# Altium PCB P-MT3620EXMSTLP-2-0.PcbDoc (part 1 of 3)
Units mm, origin at the board's own origin, x right, y up, seen from the top; angles counter-clockwise.
Board outline 50.01 x 80.01 mm, 4 copper layers (Top Layer, Mid-Layer 1, Mid-Layer 2, Bottom Layer), stack 1.536 mm thick; 94 components, 87 nets, 380 pads, 193 vias.
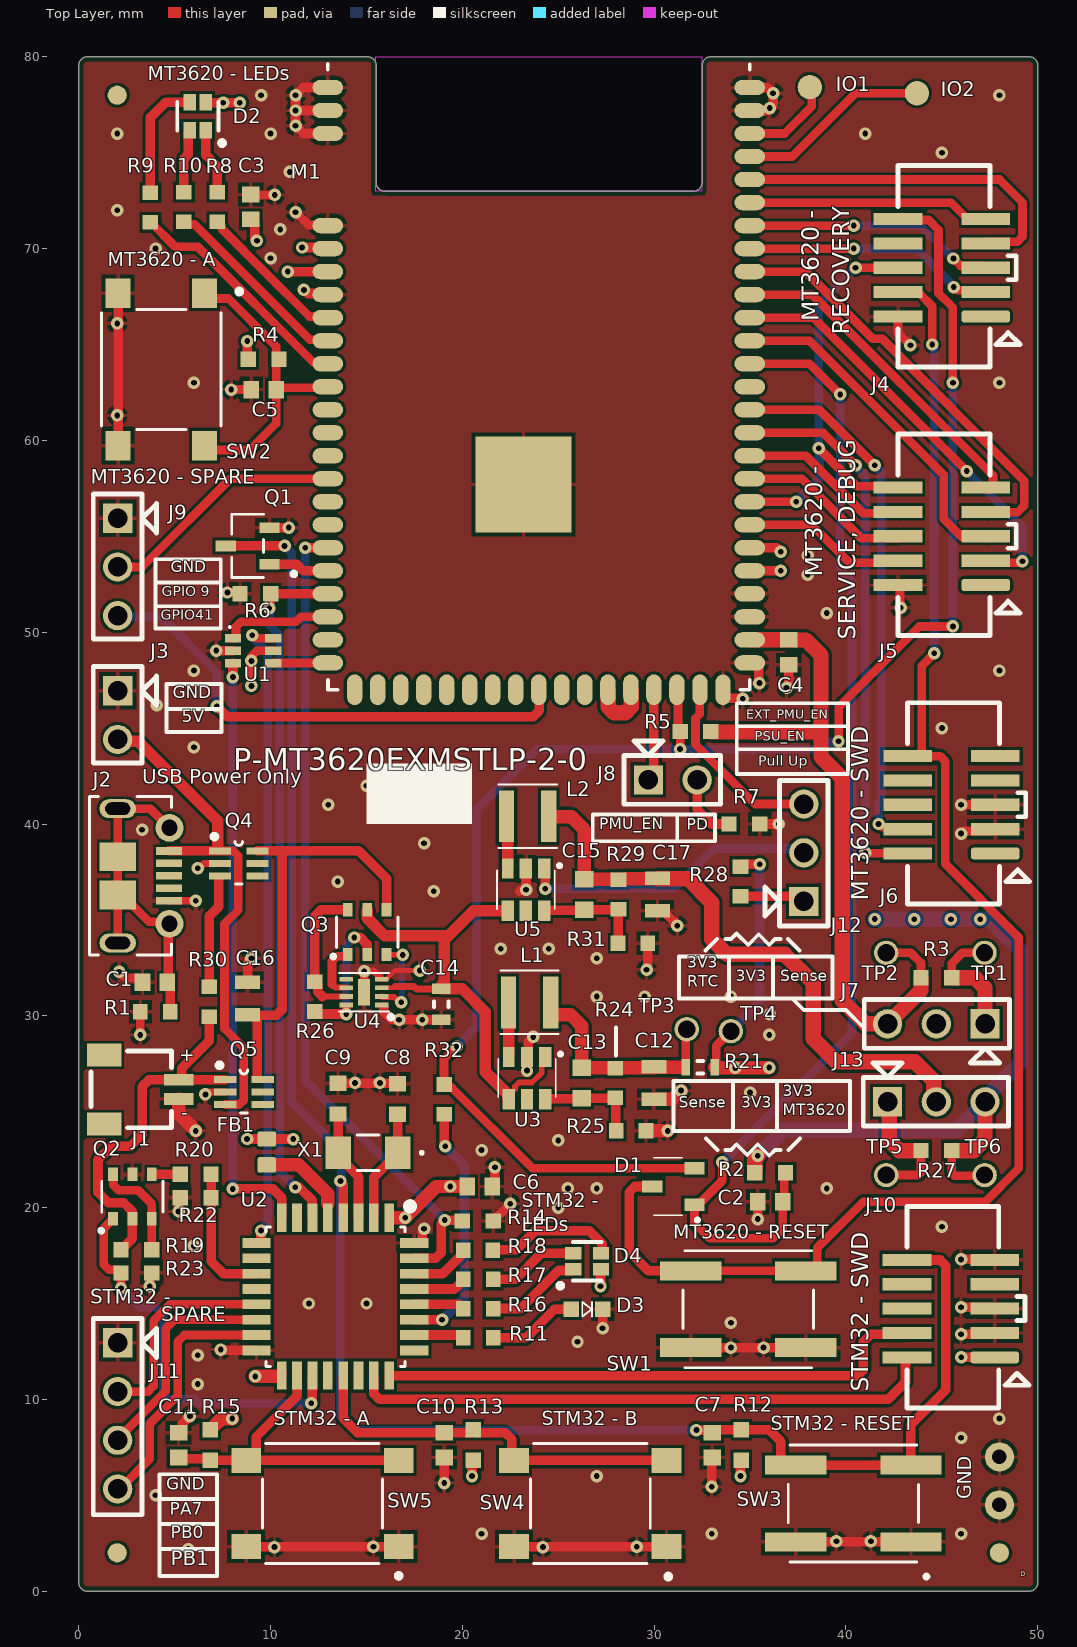
[diagram p0: Top Layer view]
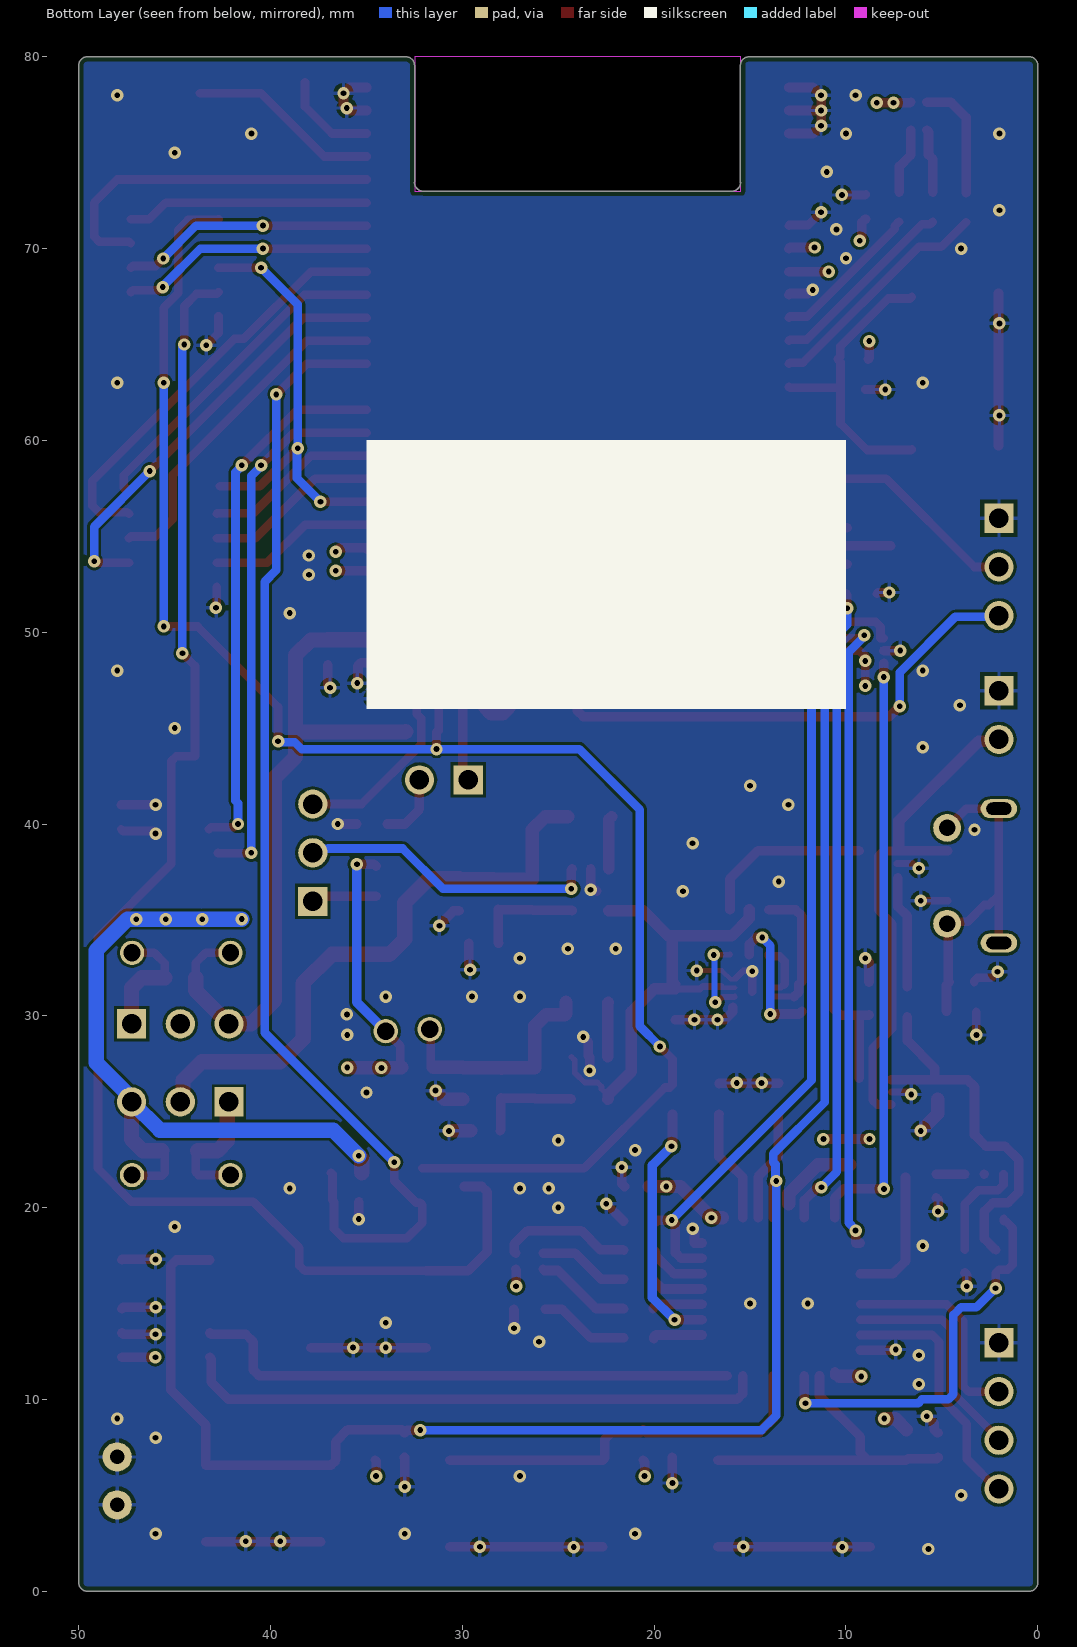
[diagram p1: Bottom Layer view, seen from below]
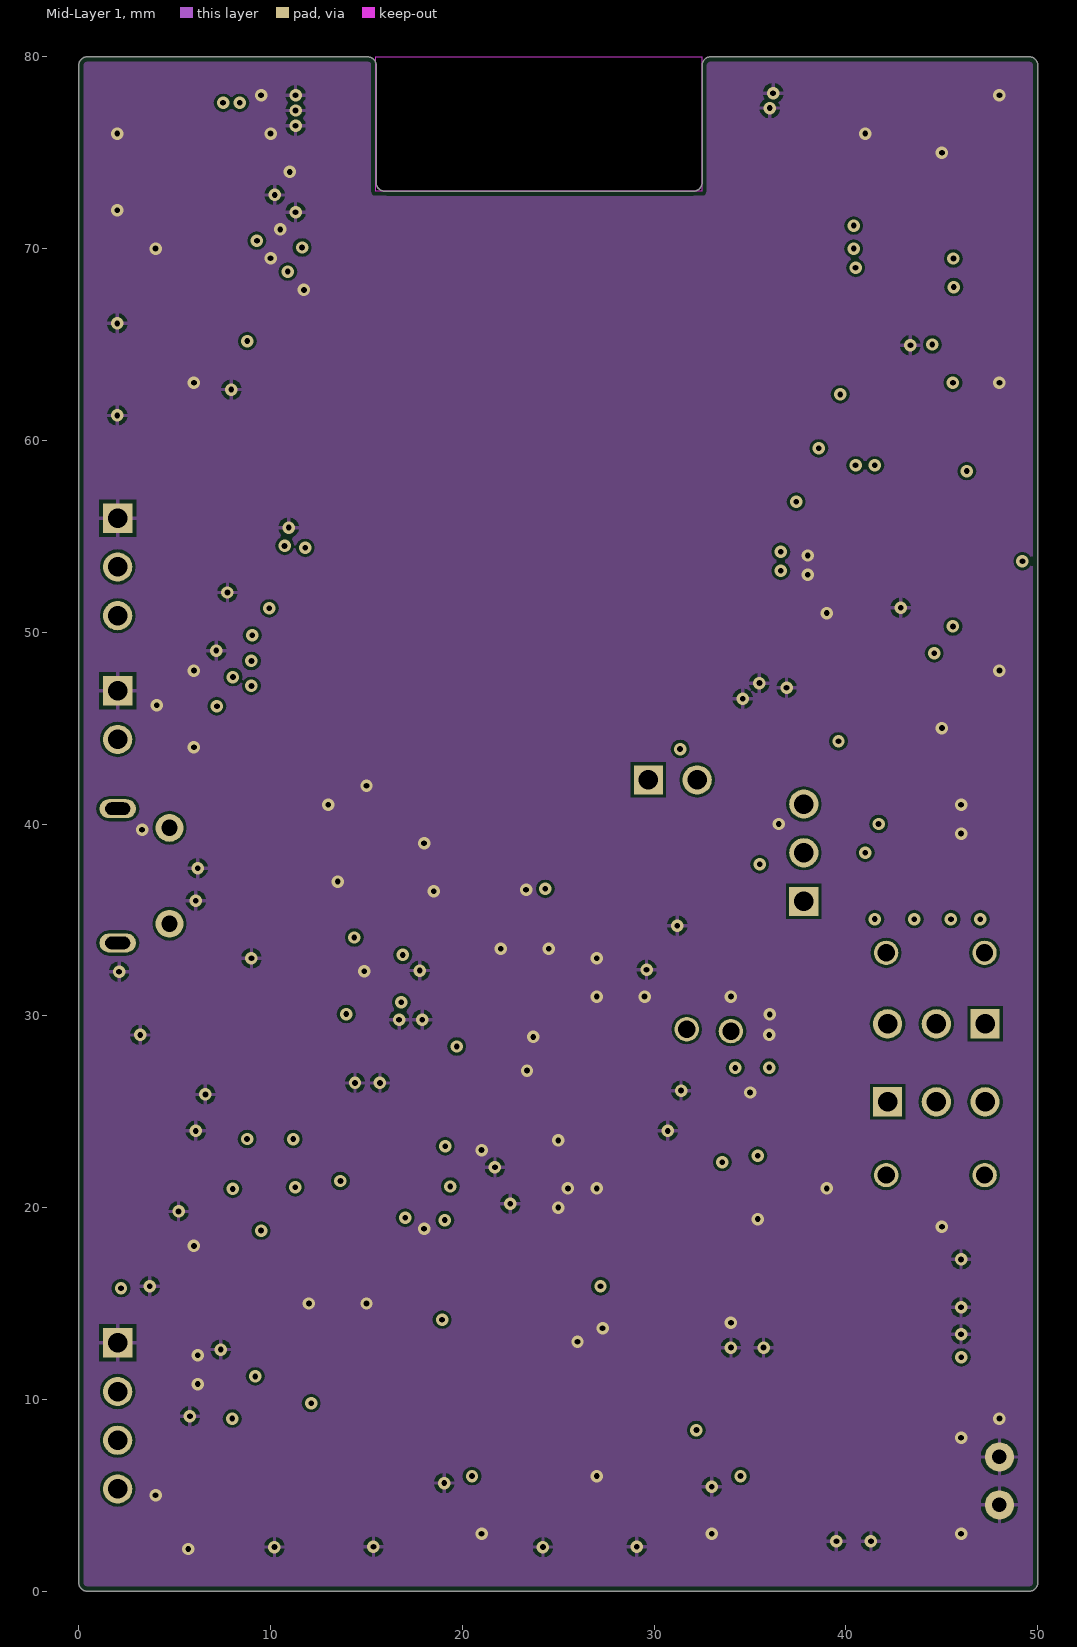
[diagram p2: Mid-Layer 1]
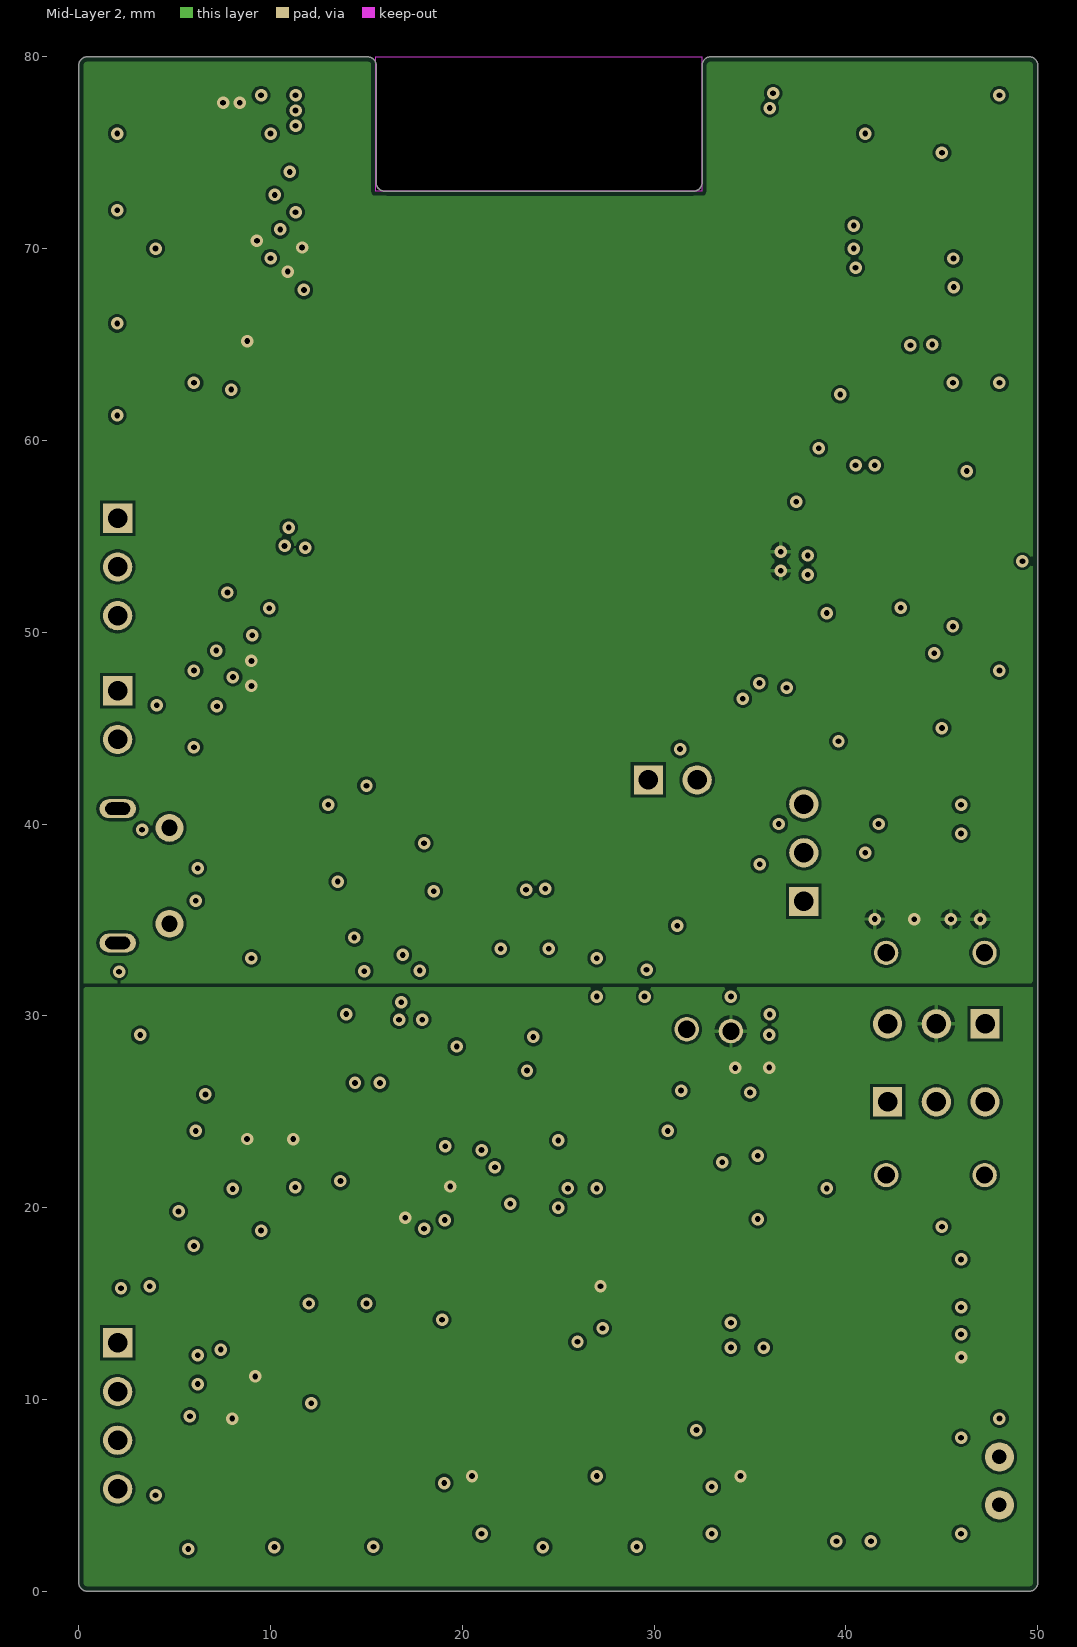
[diagram p3: Mid-Layer 2]

## Layer stack, top to bottom
Top Solder: solder mask 0.0102, Solder Resist, Dk 3.5
Top Layer: signal copper 0.018
Dielectric1: prepreg 0.36, FR-4, Dk 4.8
Mid-Layer 1: signal copper 0.035
Dielectric2: core 0.71, FR-4, Dk 4.8
Mid-Layer 2: signal copper 0.035
Dielectric3: prepreg 0.36, FR-4, Dk 4.8
Bottom Layer: signal copper 0.018
Bottom Solder: solder mask 0.0102, Solder Resist, Dk 3.5

## Board outline
0.45,-0.003 cw(c0.45,0.45) -0.003,0.45 0,0.45 0,79.55 -0.003,79.55 cw(c0.45,79.55) 0.45,80.003 0.45,80 15.097,80 15.05,80.003 cw(c15.05,79.55) 15.503,79.55 15.503,73.444 15.497,73.45 ccw(c15.95,73.45) 15.95,72.997 15.947,73 32.05,73 32.05,72.997 ccw(c32.05,73.45) 32.503,73.45 32.497,73.45 32.497,79.55 cw(c32.95,79.55) 32.95,80.003 32.9,80 49.547,80 49.55,80.003 cw(c49.55,79.55) 50.003,79.55 50,79.6 50,0.45 50.003,0.45 cw(c49.55,0.45) 49.55,-0.003 49.55,0

## Design rules (kind name [scope] priority, off if disabled: settings)
BoardOutlineClearance [All] p1: gap=0.25 ignorepadtopadclearanceinfootprint=FALSE except(0: Arc-SplitContinuation Track-SplitContinuation SMDPad-SplitContinuation THPad-SplitContinuation Via-SplitContinuation Fill-SplitContinuation Poly-SplitContinuation Region-SplitContinuation Text-SplitContinuation)
Clearance Clearance-xPP-xTP-xTT [All] p1: gap=0.15 ignorepadtopadclearanceinfootprint=FALSE except(0: Arc-Hole Track-Hole SMDPad-Hole THPad-Hole Via-Hole Fill-Hole Poly-Hole Region-Hole Text-Hole)
ComponentClearance [All] p1: gap=0.25 collisioncheckmode=3 verticalgap=0.25 showdistances=FALSE
DiffPairsRouting [All] p1: maxlimit=0.25 minlimit=0.25 mostfreqgap=0.25 toplayer_minwidth=0.381 toplayer_maxwidth=0.381 toplayer_prefwidth=0.381 midlayer1_minwidth=0.381 midlayer1_maxwidth=0.381 midlayer1_prefwidth=0.381 midlayer2_minwidth=0.381 midlayer2_maxwidth=0.381 midlayer2_prefwidth=0.381 bottomlayer_minwidth=0.381 bottomlayer_maxwidth=0.381 bottomlayer_prefwidth=0.381 maxuncoupledlength=12.5
Height [All] p1: minheight=0 maxheight=25 prefheight=12.5
HoleSize HoleSize-PTH [All] p1: absolutevalues=TRUE maxlimit=2 minlimit=0.25 maxpercent=80.000 minpercent=20.000
HoleToHoleClearance [All] p1: gap=0.35 allowstackedmicrovias=TRUE
MinimumAnnularRing "Minimum IAR  >0.45mm" [((ObjectKind = 'Pad') OR (ObjectKind = 'Via')) And (Layer = 'MultiLayer') And (HoleDiameter > AsMM(0.45))] p1: minimumring=0.175 // minimum inner annular ring for pads > 0.45mm finished hole size
MinimumAnnularRing "Minimum IAR <=0.45mm" [((ObjectKind = 'Pad') OR (ObjectKind = 'Via')) And (Layer = 'MultiLayer') And (HoleDiameter <= AsMM(0.45))] p2: minimumring=0.175 // minimum inner annular ring for pads <= 0.45mm finished hole size
MinimumSolderMaskSliver [All] p1: minsoldermaskwidth=0.08
PlaneClearance PlaneClearance-IPI [All] p1: clearance=0.25
PlaneConnect [All] p1: planeconnectstyle=Relief reliefexpansion=0.175 reliefentries=4 reliefconductorwidth=0.2 reliefairgap=0.2
PolygonConnect PolygonConnect-xTW [All] p1: connectstyle=Relief reliefconductorwidth=0.2 reliefentries=4 polygonreliefangle="90 Angle" airgapwidth=0.2
RoutingCorners [All] p1: cornerstyle=45-Degree minsetback=2.5 maxsetback=2.5
RoutingVias "RoutingVias > 0.45mm" [(ObjectKind = 'Via') And (HoleDiameter > AsMM(0.45))] p1: holewidth=0.5 width=0.85 viastyle="Through Hole" minholewidth=0.5 minwidth=0.85 maxholewidth=0.9 maxwidth=1.25 // finishet hole size > 0.45mm
RoutingVias "RoutingVias <= 0.45mm" [(ObjectKind = 'Via') And (HoleDiameter <= AsMM(0.45))] p2: holewidth=0.3 width=0.65 viastyle="Through Hole" minholewidth=0.25 minwidth=0.6 maxholewidth=0.45 maxwidth=0.8 // finishet hole size <= 0.45mm
ShortCircuit [All] p1: allowed=TRUE
SilkToSilkClearance [All] p1: silktosilkclearance=0.12
SilkToSolderMaskClearance SilkscreenOverComponentPads [IsPad] p1: minsilkscreentomaskgap=0.125 clearancetoexposedcopper=TRUE
SolderMaskExpansion [All] p1: expansion=0 istentingtop=FALSE
UnRoutedNet [All] p1: checkbadconnections=TRUE
Width Width-xTW [All] p1: maxlimit=1.5 minlimit=0.15 preferedwidth=0.2
17 further rules are at their usual default settings.

## Classes and differential pairs
component class TopLevelBlock: C1 J1 J2 J3 R1
component class STM32L031: C6 C7 C8 C9 C10 C11 D3 D4 FB1 J10 J11 Q1 R11 R12 R13 R14 R15 R16 R17 R18 R32 SW3 SW4 SW5 U2 X1
component class PowerSupply: C12 C13 C14 C15 C16 C17 J12 J13 JP3 JP4 L1 L2 Q2 Q3 Q4 Q5 R19 R20 R21 R22 R23 R24 R25 R26 R27 R28 R29 R30 R31 TP3 TP4 TP5 TP6 U3 U4 U5
component class MT3620Avnet: C2 C3 C4 C5 D1 D2 IO1 IO2 J7 J8 J9 JP1 JP2 M1 R2 R3 R4 R5 R6 R7 R8 R9 R10 SW1 SW2 TP1 TP2 U1
component class FTDIProgrammer: J4 J5 J6

## Components (designator, comment, footprint, x,y, rotation, side; value= is the part's Value field where it differs from the comment)
C1 "22 pF" CC0603 3.97,31.75 r180 top
C2 "0.1uF" CC0603 36.049,20.309 r0 top
C3 "0.1uF" CC0603 8.964,72.172 r270 top
C4 "0.1uF" CC0603 37.015,48.955 r90 top
C5 "0.1uF" CC0603 9.637,62.651 r0 top
C6 "0.1uF" CC0603 20.9,21.1 r180 top
C7 "0.1uF" CC0603 33.02,7.62 r90 top
C8 "4.3pF" "CAP 0603 (1608) x 1.2mm" 16.619,25.661 r270 top
C9 "4.3pF" "CAP 0603 (1608) x 1.2mm" 13.512,25.684 r270 top
C10 "0.1uF" CC0603 19.05,7.62 r90 top
C11 "0.1uF" CC0603 5.201,7.618 r270 top
C12 "33uF" TDK_0805 29.979,26.493 r90 top
C13 "33pF" 0603_AVX 26.229,26.493 r90 top
C14 "10µF" CAPC1608-EIA0603-1MM-MED 18.9,30.6 r90 top
C15 "33pF" 0603_AVX 26.362,36.322 r90 top
C16 "33uF" TDK_0805 8.8,30.9 r270 top
C17 "33uF" TDK_0805 30.172,36.322 r90 top
D1 "BAR43CFILM" ON_SEMI-SOT23-3 31,21.1 r90 top
D2 "LTST-C19HE1WT" LTST-C19HE1WT 6.2,76.9 r180 top
D3 "SML-D12U" "Rohm SML-D12 Red" 26.5,14.7 r180 top
D4 "LTST-C19HE1WT" LTST-C19HE1WT 26.5,17.2 r90 top
FB1 "BLM18AG601SN1D" BLM18P 9.8,22.9 r270 top
IO1 "TestPoint" Pad1.27mm#1 38.208,78.66 r0 top
IO2 "TestPoint" Pad1.27mm#2 43.647,78.34 r0 top
J1 "SM02B-SRSS-TB(LF)(SN)" SM02B-SRSS-TB 2.232,26.162 r270 top
J2 "Amphenol FCI 10118194-0001LF" MOLEX-1050170001 1.859,37.299 r270 top
J3 "MOLEX-0022284020" 0022284020 2,47 r270 top
J4 "FTSH-105-01-F-DV-K" SAMTEC-FTSH-105-01-X-DV-K 45,69 r180 top
J5 "FTSH-105-01-F-DV-K" SAMTEC-FTSH-105-01-X-DV-K 45,55 r180 top
J6 "FTSH-105-01-F-DV-K" SAMTEC-FTSH-105-01-X-DV-K 45.5,41 r180 top
J7 "MOLEX-0022284030" 0022284030 47.301,29.605 r180 top
J8 "MOLEX-0022284020" 0022284020 29.649,42.275 r0 top
J9 "MOLEX-0022284030" 0022284030 2,55.991 r270 top
J10 "FTSH-105-01-F-DV-K" SAMTEC-FTSH-105-01-X-DV-K 45.466,14.732 r180 top
J11 "MOLEX-0022284040" 0022284040 2,13 r270 top
J12 "MOLEX-0022284030" 0022284030 37.825,35.909 r90 top
J13 "MOLEX-0022284030" 0022284030 42.119,25.49 r0 top
L1 "2.2µH" NR3015T2R2M 23.5,30.7 r0 top
L2 "2.2µH" NR3015T2R2M 23.4,40.4 r0 top
M1 "AES-MS-MT3620-M-G-2" AES-MS-MT3620-M-G 12.984,47 r0 top
Q1 "2N7002ET1G" SOT23-ONS 8.8,54.5 r90 top
Q2 "SI3590DV-T1-E3" SI3590DV-T1-E3 2.794,20.574 r0 top
Q3 "SI3590DV-T1-E3" SI3590DV-T1-E3 15.038,34.359 r0 top
Q4 "LM66100DCKR" TI-LM6610-SC-70 8.339,37.945 r0 top
Q5 "LM66100DCKR" TI-LM6610-SC-70 8.607,26.022 r0 top
R1 "1 M" RC0603 3.987,30.209 r0 top
R2 "100K" VISHAY-0603 36.049,21.809 r180 top
R3 "100R" VISHAY-0603 44.71,31.975 r180 top
R4 "100K" VISHAY-0603 9.637,64.236 r180 top
R5 "100K" VISHAY-0603 32.15,44.826 r0 top
R6 "100K" VISHAY-0603 9.2,52 r0 top
R7 "100K" VISHAY-0603 34.7,40 r180 top
R8 "680R" RC0603 7.22,72.172 r90 top
R9 "300R" RC0603 3.735,72.141 r270 top
R10 "620R" RC0603 5.476,72.172 r90 top
R11 "620R" RC0603 20.828,13.208 r180 top
R12 "100K" VISHAY-0603 34.544,7.62 r270 top
R13 "100K" VISHAY-0603 20.574,7.62 r270 top
R14 "10K" VISHAY-0603 20.8,19.3 r180 top
R15 "100K" VISHAY-0603 6.858,7.62 r90 top
R16 "680R" RC0603 20.828,14.732 r0 top
R17 "620R" RC0603 20.828,16.256 r0 top
R18 "300R" RC0603 20.815,17.78 r180 top
R19 "100K" VISHAY-0603 3,17.8 r180 top
R20 "10K" VISHAY-0603 6.096,21.731 r180 top
R21 "0R" 1608-EIA0603 32.401,27.319 r0 top
R22 "10K" VISHAY-0603 6.096,20.506 r0 top
R23 "100K" VISHAY-0603 3,16.592 r180 top
R24 "150k" RC0603 27.979,26.493 r90 top
R25 "33.2k" RC0603 28.8,24 r180 top
R26 "0R033" RC0603 12.3,31 r90 top
R27 "0.1R" VISHAY-0603 44.71,22.975 r0 top
R28 "4.7K" RC0603 34.5,37 r90 top
R29 "150k" RC0603 28.14,36.322 r90 top
R30 "33.2k" RC0603 6.804,30.734 r90 top
R31 "33.2k" RC0603 28.889,33.782 r180 top
R32 "1K" RC0603 19.044,25.644 r90 top
SW1 "SWI TACT SPN0 PANASONIC EVQQ2P03W" EVQQ2P03W 34.9,14.7 r0 top
SW2 "PTS645SM43SMTR92LFS" "C&K PTS645SM43SMTR92LFS" 4.3,63.7 r270 top
SW3 "SWI TACT SPN0 PANASONIC EVQQ2P03W" EVQQ2P03W 40.386,4.572 r180 top
SW4 "PTS645SM43SMTR92LFS" "C&K PTS645SM43SMTR92LFS" 26.67,4.572 r180 top
SW5 "PTS645SM43SMTR92LFS" "C&K PTS645SM43SMTR92LFS" 12.7,4.572 r180 top
TP1 "TestPointHole" PTH1.27mm-0.9mm 47.224,33.283 r180 top
TP2 "TestPointHole" PTH1.27mm-0.9mm 42.092,33.283 r180 top
TP3 "TestPointHole" PTH1.27mm-0.9mm 31.7,29.3 r90 top
TP4 "TestPointHole" PTH1.27mm-0.9mm 34,29.2 r90 top
TP5 "TestPointHole" PTH1.27mm-0.9mm 42.095,21.696 r90 top
TP6 "TestPointHole" PTH1.27mm-0.9mm 47.226,21.696 r90 top
U1 "74LVC2G17DW-7" Nexperia-SOT363 9.088,49.037 r0 top
U2 "STM32L031K6T6" LQFP32-ST 13.381,15.355 r270 top
U3 "TLV62569DBVR" TI-SOT23-6 23.368,26.754 r180 top
U4 "LTC4361CDC-1" LTC4361-1#TRPBF 14.869,31.233 r90 top
U5 "TLV62569DBVR" TI-SOT23-6 23.314,36.576 r180 top
X1 "32.768kHz" XTAL_NX3215SA-00 15.082,22.855 r180 top

## Footprints (in the part's own frame and the unit in brackets; to place one, negate y for a bottom-side part, rotate by r counter-clockwise, add the part's x,y. Pads: shape width x height; smd on the part's side, far side on the other; paste and mask are expansions set on the pad)
0603_AVX [mil]
  rect 34x38 smd: 1(-31.5,0) 2(31.5,0)
  body extent -62,-32 62,32, height 50
1608-EIA0603 [mm] "Chip Capacitor, 2-Leads, Body 1.60x0.80mm, IPC High Density"
  rect 0.45x0.85 smd: 1(-0.75,0) 2(0.75,0)
  silkscreen extent -0.15,-0.33 0.15,0.33, body extent -1.12,-0.57 1.12,0.58, height 1
0022284020 [mil] "2-way header"
  rect 60x60 hole 40: 1(2,1)
  round 60 hole 40: 2(102,1)
  silkscreen extent -48,-49 150,81, body extent -53,-54 155,86, height 50
0022284030 [mil] "3-way header"
  rect 60x60 hole 40: 1(2,1)
  round 60 hole 40: 2(102,1) 3(202,1)
  silkscreen extent -48,-49 250,81, body extent -56,-61 261,86, height 50
0022284040 [mil] "4-way header"
  rect 60x60 hole 40: 1(2,1)
  round 60 hole 40: 2(102,1) 3(202,1) 4(302,1)
  silkscreen extent -48,-49 355,81, body extent -53,-54 360,86, height 50
AES-MS-MT3620-M-G [mm]
  rrect100% 1.6x0.8 smd: 1(0,24.2) 2(0,23) 3(0,21.8) 4(0,20.6) 5(0,19.4) 6(0,18.2) 7(0,17) 8(0,15.8) 9(0,14.6) 10(0,13.4) 11(0,12.2) 12(0,11) 13(0,9.8) 14(0,8.6) 15(0,7.4) 16(0,6.2) 17(0,5) 18(0,3.8) 19(0,2.6) 20(0,1.4) 38(22,1.4) 39(22,2.6) 40(22,3.8) 41(22,5) 42(22,6.2) 43(22,7.4) 44(22,8.6) 45(22,9.8) 46(22,11) 47(22,12.2) 48(22,13.4) 49(22,14.6) 50(22,15.8) 51(22,17) 52(22,18.2) 53(22,19.4) 54(22,20.6) 55(22,21.8) 56(22,23) 57(22,24.2) 58(22,25.4) 59(22,26.6) 60(22,27.8) 61(22,29) 62(22,30.2) 63(22,31.4) 64(0,29) 65(0,30.2) 66(0,31.4)
  rrect100% 0.8x1.6 smd: 21(1.4,0) 22(2.6,0) 23(3.8,0) 24(5,0) 25(6.2,0) 26(7.4,0) 27(8.6,0) 28(9.8,0) 29(11,0) 30(12.2,0) 31(13.4,0) 32(14.6,0) 33(15.8,0) 34(17,0) 35(18.2,0) 36(19.4,0) 37(20.6,0)
  rect 5x5 smd paste-1: 67(10.2,10.7)
  Keep-Out Layer board cut-out: 2.5,33 2.5,33 19.5,33 19.5,26 19.5,26 2.5,26
  silkscreen extent 0,0 22,32.64, body extent -0.8,-0.8 22.8,33.1, height 1.27
BLM18P [mm] "Chip Ferrite Bead EIA0603, BLM18P series"
  rrect25% 0.8x0.95 smd: 1(-0.675,0)
  rrect20% 0.8x0.95 smd: 2(0.675,0)
  body extent -1.37,-0.77 1.38,0.78, height 0.8
"C&K PTS645SM43SMTR92LFS" [mm]
  rect 1.549x1.295 smd: 1(-3.975,2.25) 2(3.975,2.25) 3(-3.975,-2.25) 4(3.975,-2.25)
  silkscreen extent -4.19,-3.12 3.12,4.19, body extent -5.08,-3.33 5.08,4.32, height 1.27
"CAP 0603 (1608) x 1.2mm" [mm] "murata largest recogmended dimentions for 1608 +-0.2mm"
  rect 0.8x0.9 smd: 1(-0.8,0) 2(0.8,0)
  body extent -1.32,-0.62 1.33,0.63, height 1.2
CAPC1608-EIA0603-1MM-MED [mm] "Chip Capacitor, 2-Leads, Body 1.60x0.80mm, IPC Medium Density"
  rect 0.55x0.95 smd: 1(-0.8,0) 2(0.8,0)
  silkscreen extent -0.15,-0.38 0.15,0.38, body extent -1.37,-0.77 1.38,0.78, height 1
CC0603 [mil]
  rect 32x36 smd: 1(-25.5,0) 2(25.5,0)
  body extent -55,-31 55,31, height 50
EVQQ2P03W [mm] "Tactile switch SPNO 6 mm Square Thin Type SMD, 3.1mm height"
  rect 3.2x1 smd: 1(-3,2) 2(-3,-2) 3(3,2) 4(3,-2)
  silkscreen extent -3.4,-3.05 3.4,3.05, body extent -4.82,-3.22 4.83,3.23, height 3.1
LQFP32-ST [mil]
  rect 58x20 smd: 1(-162,110.24) 2(-162,78.74) 3(-162,47.24) 4(-162,15.75) 5(-162,-15.75) 6(-162,-47.24) 7(-162,-78.74) 8(-162,-110.24) 17(162,-110.24) 18(162,-78.74) 19(162,-47.24) 20(162,-15.75) 21(162,15.75) 22(162,47.24) 23(162,78.74) 24(162,110.24)
  rect 20x58 smd: 9(-110.24,-162) 10(-78.74,-162) 11(-47.24,-162) 12(-15.75,-162) 13(15.75,-162) 14(47.24,-162) 15(78.74,-162) 16(110.24,-162) 25(110.24,162) 26(78.74,162) 27(47.24,162) 28(15.75,162) 29(-15.75,162) 30(-47.24,162) 31(-78.74,162) 32(-110.24,162)
  silkscreen extent -193,-143 143,160, body extent -200,-191 191,191, height 50
LTC4361-1#TRPBF [mm]
  rect 0.25x0.7 smd: 1(-0.675,-0.925) 2(-0.225,-0.925) 3(0.225,-0.925) 4(0.675,-0.925) 5(0.675,0.925) 6(0.225,0.925) 7(-0.225,0.925) 8(-0.675,0.925)
  rect 1.37x0.64 smd paste-0.15: 9(0,0)
  silkscreen extent -1.4,-1.5 1,1.3, body extent -1.53,-1.63 1.05,1.45, height 1.27
LTST-C19HE1WT [mm] "RGB LED"
  rect 0.65x0.85 smd: 1(-0.425,0.725) 2(0.425,0.725) 3(0.425,-0.725) 4(-0.425,-0.725)
  silkscreen extent -1.4,-0.75 1.07,1.52, body extent -1.52,-1.15 1.17,1.65, height 1.27
MOLEX-1050170001 [mm]
  rect 0.406x1.346 smd: 1(-1.3,2.845) 2(-0.65,2.845) 3(0,2.845) 4(0.65,2.845) 5(1.3,2.845)
  rect 1.499x1.905 smd paste-0.2: 6(-1,0.17) 6(1,0.17)
  round 1.45 hole 0.85: 7(2.5,2.87) 8(-2.5,2.87)
  oval 0.991x1.905 hole 0.65 slot 1.3 at 90 deg: 9(3.5,0.17) 10(-3.5,0.17)
  silkscreen extent -4.13,-1.3 4.13,2.97, body extent -4.2,-1.38 4.2,3.6, height 1.27
Nexperia-SOT363 [mm]
  rect 0.85x0.45 smd: 1(-1.05,0.65) 2(-1.05,0) 3(-1.05,-0.65) 4(1.05,-0.65) 5(1.05,0) 6(1.05,0.65)
  silkscreen extent -1.27,1.18 -1.17,1.28, body extent -1.77,-1.37 1.78,1.38, height 1.27
NR3015T2R2M [mm]
  rect 0.8x2.7 smd: 1(-1.1,0) 2(1.1,0)
  silkscreen extent -1.52,-1.65 1.52,1.65, body extent -1.68,-1.7 1.68,1.7, height 1.27
ON_SEMI-SOT23-3 [mm]
  rect 0.65x1.06 smd: 1(-0.95,-1.1) 2(0.95,-1.1) 3(0,1.1)
  silkscreen extent -1.81,-1.31 1.5,1, body extent -1.93,-1.77 1.58,1.78, height 1.27
Pad1.27mm#1 [mm] "1.27mm dia round pad"
  round 1.27 smd paste-2.54: 1(-0.092,-0.24)
  body extent -0.73,-0.87 0.66,0.66, height 1.27
Pad1.27mm#2 [mm] "1.27mm dia round pad"
  round 1.27 smd paste-2.54: 1(0.053,-0.24)
  body extent -0.66,-0.87 0.69,0.66, height 1.27
PTH1.27mm-0.9mm [mm] "1.27mm dia round pad w/ 0.9mm dia hole"
  round 1.27 hole 0.9: 1(0,0)
  body extent -0.64,-0.64 0.64,0.64, height 1.27
RC0603 [mil]
  rect 30x32 smd: 1(-30.5,0) 2(30.5,0)
  body extent -58,-29 58,29, height 50
"Rohm SML-D12 Red" [mm]
  rect 0.8x0.8 smd paste-0.05: 1(-0.825,0) 2(0.825,0)
  silkscreen extent -0.25,-0.38 0.25,0.38, body extent -1.43,-0.6 1.43,0.6, height 0.55
SAMTEC-FTSH-105-01-X-DV-K [mil] ".050\" Micro Terminal Strip, 10 pos"
  rrect50% 100x25 smd: 1(-90,100)
  rect 100x25 smd: 2(90,100) 3(-90,50) 4(90,50) 5(-90,0) 6(90,0) 7(-90,-50) 8(90,-50) 9(-90,-100) 10(90,-100)
  silkscreen extent -160,-210 90,204, body extent -165,-227 158,218, height 240
SI3590DV-T1-E3 [mil]
  rect 20x27.52 smd: 1(-39.76,-45.79) 2(0,-45.79) 3(39.76,-45.79) 4(39.76,45.79) 5(0,45.79) 6(-39.76,45.79)
  silkscreen extent -68,-74 63,31, body extent -72,-78 66,61, height 50
SM02B-SRSS-TB [mm] "2 Terminal SMB connector"
  rect 0.6x1.55 smd: 1(-0.5,2.975) 2(0.5,2.975)
  rect 1.2x1.8 smd: ""(-1.8,-0.9) ""(1.8,-0.9)
  silkscreen extent -2,-1.6 2,2.6, body extent -2.4,-1.8 2.4,3.75, height 1.27
SOT23-ONS [mil]
  rect 22x42 smd: 1(-37.5,-45) 2(37.5,-45) 3(0,45)
  silkscreen extent -65,-99 65,33, body extent -73,-104 73,79, height 50
TDK_0805 [mm]
  rect 0.7x1.3 smd: 1(-0.85,0) 2(0.85,0)
  body extent -1.2,-0.65 1.2,0.65, height 1.27
TI-LM6610-SC-70 [mil]
  rect 46x14 smd: 1(-38.5,25.59) 2(-38.5,0) 3(-38.5,-25.59) 4(38.5,-25.59) 5(38.5,0) 6(38.5,25.59)
  silkscreen extent -55,-42 8,60, body extent -74,-56 74,65, height 50
TI-SOT23-6 [mm]
  rect 0.65x1.06 smd: 1(-0.95,-1.1) 2(0,-1.1) 4(0.95,1.1) 5(0,1.1) 6(-0.95,1.1)
  rect 0.6x1.06 smd: 3(0.95,-1.1)
  silkscreen extent -1.81,-1.31 1.5,1, body extent -1.93,-1.77 1.58,1.78, height 1.27
VISHAY-0603 [mm]
  rect 0.8x0.8 smd: 1(-0.8,0) 2(0.8,0)
  body extent -1.29,-0.53 1.3,0.53, height 1.27
XTAL_NX3215SA-00 [mil]
  rect 52x67 smd: 1(-61,0) 2(61,0)
  silkscreen extent -113,-36 22,36, body extent -116,-40 87,40, height 50

## Part data
C1: library part CC0603JRNPO0BN220, "22PF 0603 100V C0G/NPO", Capacitance=22pF, Case Code (Imperial)=0603, Case Code (Metric)=1608, Dielectric=C0G, Manufacturer=Yageo, Max Operating Temperature=125°C, Min Operating Temperature=-55°C, Supplier Part Number 1=311-1755-1-ND, Tolerance=5%, Voltage Rating=100V, Case/Package=0603, Category="Ceramic Capacitors", ComponentLink1Description=https://datasheet.ciiva.com/13207/upy-gp-np0-16v-to-50v-8-13207786.pdf?src-supplier=Mouser, ComponentLink1URL=https://datasheet.ciiva.com/13207/upy-gp-np0-16v-to-50v-8-13207786.pdf?src-supplier=Mouser, Composition=Ceramic, Depth=0.8mm, Height=0.8mm, Lead Free="Lead Free", Length=1.6mm, Manufacturer Part Number=CC0603JRNPO0BN220, Mount="Surface Mount", Packaging="Tape and Reel", Pricing 1="1=0.10000, 10=0.06800, 50=0.03680, 100=0.03010, 500=0.02152, 1000=0.01691 (USD)", RoHS=Yes, Stock 1=18072, Supplier 1=Digi-Key, Termination=SMD/SMT, Thickness=0.035inch, Voltage Rating (DC)=100V, Weight=7.1E-05oz, Width=0.8mm
C2 C3 C4 C5 C6 C7 C10 C11: library part CC0603KRX7R8BB104, "0.1uF, 0603, CC0603KRX7R8BB104, Yageo, 25V, X7R, 10%, FULL REEL", Capacitance=100nF, Case Code (Imperial)=0603, Case Code (Metric)=1608, Dielectric=X7R, Manufacturer=Yageo, Max Operating Temperature=125°C, Min Operating Temperature=-55°C, Package Quantity=1, Supplier Part Number 1=311-1341-1-ND, Tolerance=10%, Voltage=25V, Case/Package=0603, Category="Ceramic Capacitors", ComponentLink1Description=https://datasheet.ciiva.com/11786/0900766b80c10176-11786120.pdf?src-supplier=RSComponents, ComponentLink1URL=https://datasheet.ciiva.com/11786/0900766b80c10176-11786120.pdf?src-supplier=RSComponents, ComponentLink2Description=https://datasheet.ciiva.com/144/mlccorderingcode-144075.pdf?src-supplier=Digi-Key, ComponentLink2URL=https://datasheet.ciiva.com/144/mlccorderingcode-144075.pdf?src-supplier=Digi-Key, ComponentLink3Description=https://datasheet.ciiva.com/17434/upy-gphc-x7r-6-3v-to-50v-8-17434263.pdf?src-supplier=Avnet+Europe, ComponentLink3URL=https://datasheet.ciiva.com/17434/upy-gphc-x7r-6-3v-to-50v-8-17434263.pdf?src-supplier=Avnet+Europe, ComponentLink4Description=https://datasheet.ciiva.com/26829/getdatasheetpartid-403577-26829431.pdf?src-supplier=Verical, ComponentLink4URL=https://datasheet.ciiva.com/26829/getdatasheetpartid-403577-26829431.pdf?src-supplier=Verical, ComponentLink5Description=https://datasheet.ciiva.com/11587/upy-gphc-x7r-6-3v-to-50v-8-11587208.pdf?src-supplier=Avnet, ComponentLink5URL=https://datasheet.ciiva.com/11587/upy-gphc-x7r-6-3v-to-50v-8-11587208.pdf?src-supplier=Avnet, ComponentLink6Description=https://datasheet.ciiva.com/13389/upy-gphc-x7r-6-3v-to-50v-8-13389352.pdf?src-supplier=Mouser, ComponentLink6URL=https://datasheet.ciiva.com/13389/upy-gphc-x7r-6-3v-to-50v-8-13389352.pdf?src-supplier=Mouser, ComponentLink7Description=https://datasheet.ciiva.com/28450/1489800-28450584.pdf?src-supplier=Element14, ComponentLink7URL=https://datasheet.ciiva.com/28450/1489800-28450584.pdf?src-supplier=Element14, ComponentLink8Description=https://datasheet.ciiva.com/144/mlccorderingcode-144073.pdf?src-supplier=Digi-Key, ComponentLink8URL=https://datasheet.ciiva.com/144/mlccorderingcode-144073.pdf?src-supplier=Digi-Key, ComponentLink9Description=https://datasheet.ciiva.com/144/mlccorderingcode-144074.pdf?src-supplier=Digi-Key, ComponentLink9URL=https://datasheet.ciiva.com/144/mlccorderingcode-144074.pdf?src-supplier=Digi-Key, ComponentLink10Description=https://datasheet.ciiva.com/7978/1489800-7978155.pdf?src-supplier=Element14, ComponentLink10URL=https://datasheet.ciiva.com/7978/1489800-7978155.pdf?src-supplier=Element14, Composition=Ceramic, Depth=0.8mm, Halogen Free="Halogen Free", Height=0.8mm, Lead Free="Lead Free", Length=1.6mm, Manufacturer Part Number=CC0603KRX7R8BB104, Mount="Surface Mount", Number of Pins=2, Packaging="Tape and Reel", Pricing 1="1=0.10000, 10=0.05300, 100=0.02340, 500=0.01674, 1000=0.01316 (USD)", Radiation Hardening=No, REACH SVHC=Unknown, RoHS=Yes, Stock 1=12615855, Supplier 1=Digi-Key, Termination=SMD/SMT, Thickness=0.035inch, Voltage Rating=25V, Voltage Rating (DC)=25V, Width=0.8mm
C8 C9: library part "4.3pF 0603 CL10C4R3CB8NNNC", "4.3PF 50V C0G/NP0 0603", Case Code (Imperial)=0603, Case Code (Metric)=1608, Dielectric=C0G, Manufacturer=Samsung, Manufacturer Part Number=CL10C4R3CB8NNNC, Max Operating Temperature=125°C, Min Operating Temperature=-55°C, Package Quantity=1, Supplier Part Number 1=1276-2309-1-ND, Voltage Rating=50V, Capacitance=4.3pF, Case/Package=0603, Category="Ceramic Capacitors", ComponentLink1Description=https://datasheet.ciiva.com/16200/cl10c4r3cb8nnnc-16200048.pdf?src-supplier=Future+Electronics, ComponentLink1URL=https://datasheet.ciiva.com/16200/cl10c4r3cb8nnnc-16200048.pdf?src-supplier=Future+Electronics, ComponentLink2Description=https://datasheet.ciiva.com/25778/cl10c4r3cb8nnnc-25778560.pdf?src-supplier=Digi-Key, ComponentLink2URL=https://datasheet.ciiva.com/25778/cl10c4r3cb8nnnc-25778560.pdf?src-supplier=Digi-Key, ComponentLink3Description=https://datasheet.ciiva.com/26838/getdatasheetpartid-660050-26838544.pdf?src-supplier=Verical, ComponentLink3URL=https://datasheet.ciiva.com/26838/getdatasheetpartid-660050-26838544.pdf?src-supplier=Verical, Depth=0.8mm, Height=0.8mm, Lead Free="Lead Free", Length=1.6mm, Mount="Surface Mount", Packaging="Tape and Reel", Pricing 1="1=0.10000, 10=0.06300, 100=0.02810, 500=0.02010, 1000=0.01579 (USD)", Radiation Hardening=No, RoHS=Yes, Stock 1=15793, Supplier 1=Digi-Key, Thickness=0.035inch, Voltage Rating (DC)=50V, Width=0.031inch
C12 C16 C17: library part "33uF 0805 X5R 10V", "CAP CER 33UF 10V X5R 0805", Case Code (Imperial)=0805, Case Code (Metric)=2012, Dielectric=X5R, Dielectric Material=Ceramic, Manufacturer=TDK, Manufacturer Part Number=C2012X5R1A336M125AC, Max Operating Temperature=85°C, Min Operating Temperature=-55°C, Package Quantity=1, Supplier Part Number 1=445-8238-1-ND, Tolerance=20%, Voltage Rating=10V, Capacitance=33uF, Case/Package=0805, Category="Ceramic Capacitors", ComponentLink1Description=https://datasheet.ciiva.com/24216/c2012x5r1a336m125ac-264804-24216541.pdf?src-supplier=Mouser, ComponentLink1URL=https://datasheet.ciiva.com/24216/c2012x5r1a336m125ac-264804-24216541.pdf?src-supplier=Mouser, ComponentLink2Description=https://datasheet.ciiva.com/6259/tdkmlcccaprange-6259263.pdf?src-supplier=Digi-Key, ComponentLink2URL=https://datasheet.ciiva.com/6259/tdkmlcccaprange-6259263.pdf?src-supplier=Digi-Key, Composition=Ceramic, Depth=1.25mm, Height=1.25mm, Lead Free="Lead Free", Length=2mm, Mount="Surface Mount", Packaging="Tape and Reel", Pricing 1="1=1.03000, 10=0.78700, 50=0.65340, 100=0.56270, 500=0.43560, 1000=0.37510 (USD)", REACH SVHC="No SVHC", RoHS=Yes, Stock 1=30620, Supplier 1=Digi-Key, Termination=SMD/SMT, Thickness=0.057inch, Voltage Rating (DC)=10V, Weight=0.000194oz, Width=0.049inch
C13 C15: library part 0603YC330JAT2A, "33 pF, 16 V, 0603 [1608 Metric], ± 5%, X7R, AVX 0603 MLCC, AVX - 0603YC330JAT2A - SMD Multilayer Ceramic Capacitor", Case Code (Imperial)=0603, Case Code (Metric)=1608, Dielectric=X7R, Manufacturer="Kyocera AVX", Max Operating Temperature=125°C, Min Operating Temperature=-55°C, Package Quantity=4000, Supplier Part Number 1=478-6211-1-ND, Tolerance=5%, Voltage Rating=16V, Capacitance=33pF, Case/Package=0603, Category="Ceramic Capacitors", ComponentLink1Description=https://datasheet.ciiva.com/150/cx7r-150936.pdf?src-supplier=Digi-Key, ComponentLink1URL=https://datasheet.ciiva.com/150/cx7r-150936.pdf?src-supplier=Digi-Key, ComponentLink2Description=https://datasheet.ciiva.com/150/cx7r-150937.pdf?src-supplier=Digi-Key, ComponentLink2URL=https://datasheet.ciiva.com/150/cx7r-150937.pdf?src-supplier=Digi-Key, ComponentLink3Description=https://datasheet.ciiva.com/150/cx7r-150938.pdf?src-supplier=Digi-Key, ComponentLink3URL=https://datasheet.ciiva.com/150/cx7r-150938.pdf?src-supplier=Digi-Key, ComponentLink4Description=https://datasheet.ciiva.com/22676/1679506-22676970.pdf?src-supplier=Element14, ComponentLink4URL=https://datasheet.ciiva.com/22676/1679506-22676970.pdf?src-supplier=Element14, ComponentLink5Description=https://datasheet.ciiva.com/28533/1679506-28533438.pdf?src-supplier=Element14, ComponentLink5URL=https://datasheet.ciiva.com/28533/1679506-28533438.pdf?src-supplier=Element14, Depth=0.81mm, Dissipation Factor=3.5%, Lead Free="Lead Free", Length=1.6mm, Manufacturer Part Number=0603YC330JAT2A, Mount="Surface Mount", Number of Pins=2, Packaging="Tape and Reel", Pricing 1="1=0.21000, 10=0.14200, 100=0.07210, 500=0.04934, 1000=0.04364 (USD)", Radiation Hardening=No, REACH SVHC="No SVHC", RoHS=Yes, Stock 1=15613, Supplier 1=Digi-Key, Termination=SMD/SMT, Thickness=0.035inch, Voltage Rating (DC)=16V, Width=0.81mm
C14: library part "10µF 0603 X5R 25V", "CAP CER 10UF 25V 20% X5R 0603", Manufacturer="TDK Corporation", Manufacturer Part Number=C1608X5R1E106M080AC, Operating Temperature="-55°C ~ 125°C", Package / Case="0603 (1608 Metric)", Ratings=-, Supplier Part Number 1=445-9015-2-ND, Temperature Coefficient=X5R, Tolerance=±20%, Voltage - Rated=25V, Applications="General Purpose", Capacitance=10µF, Category=Capacitors, ComponentLink1Description=http://product.tdk.com/en/catalog/datasheets/mlcc_commercial_general_en.pdf, ComponentLink1URL=http://product.tdk.com/en/catalog/datasheets/mlcc_commercial_general_en.pdf, Features=-, Height - Seated (Max)=-, Lead Spacing=-, Lead Style=-, Mounting Type="Surface Mount, MLCC", Packaging="Tape & Reel (TR)", Pricing 1=0.00754, RoHS="RoHS Compliant", Size / Dimension="0.063\" L x 0.031\" W (1.60mm x 0.80mm)", Stock 1=47833, Supplier 1=Digi-Key, Thickness (Max)="0.039\" (1.00mm)"
D1: "DIODE ARRAY SCHOTTKY 30V SOT23-3", Average Rectified Current=100mA, Capacitance=7pF, Case/Package=SOT-23, Forward Voltage=1V, Manufacturer=STMicroelectronics, Max Forward Surge Current (Ifsm)=750mA, Max Operating Temperature=150°C, Max Repetitive Reverse Voltage (Vrrm)=30V, Min Operating Temperature=-65°C, Package Quantity=3000, Peak Reverse Current=500nA, Power Dissipation=250mW, Supplier Part Number 1=1562326RL, ComponentLink1Description=http://www.farnell.com/datasheets/1700360.pdf, ComponentLink1URL=http://www.farnell.com/datasheets/1700360.pdf, ComponentLink2Description=http://www.jameco.com/Jameco/Products/ProdDS/869700.pdf, ComponentLink2URL=http://www.jameco.com/Jameco/Products/ProdDS/869700.pdf, ComponentLink3Description=http://www.alliedelec.com/images/products/datasheets/bm/STMICROELECTRONICS/70013844.pdf, ComponentLink3URL=http://www.alliedelec.com/images/products/datasheets/bm/STMICROELECTRONICS/70013844.pdf, ComponentLink4Description=http://www.farnell.com/datasheets/1837092.pdf, ComponentLink4URL=http://www.farnell.com/datasheets/1837092.pdf, ComponentLink5Description=http://www.st.com/content/ccc/resource/technical/document/datasheet/b3/b4/6e/ab/17/40/40/62/CD00000764.pdf/files/CD00000764.pdf/jcr:content/translations/en.CD00000764.pdf, ComponentLink5URL=http://www.st.com/content/ccc/resource/technical/document/datasheet/b3/b4/6e/ab/17/40/40/62/CD00000764.pdf/files/CD00000764.pdf/jcr:content/translations/en.CD00000764.pdf, ComponentLink6Description=http://www.st.com/web/en/resource/technical/document/datasheet/CD00000764.pdf, ComponentLink6URL=http://www.st.com/web/en/resource/technical/document/datasheet/CD00000764.pdf, Contact Plating=Matte,Tin, Current Rating=100mA, Element Configuration="Common Cathode", Forward Current=100mA, Height=0.95mm, Lead Free="Lead Free", Length=2.9mm, Manufacturer Part Number=BAR43CFILM, Max Reverse Voltage (DC)=30V, Mount="Surface Mount", Number of Pins=3, Packaging="Tape and Reel", Peak Non-Repetitive Surge Current=750mA, Radiation Hardening=No, REACH SVHC="No SVHC", Reverse Recovery Time=5ns, Stock 1=0, Supplier 1=Farnell, Termination=SMD/SMT, Voltage Rating (DC)=30V, Weight=0.01lb, Width=3.05mm
D2 D4: "LED RGB DIFFUSED 0606 SMD", Color="Red, Green, Blue (RGB)", Current - Test="20mA Red, 20mA Green, 20mA Blue", Lens Color=White, Manufacturer="Lite-On Inc.", Millicandela Rating="112.5mcd Red, 281mcd Green, 104mcd Blue", Package / Case="0606 (1616 Metric)", Supplier Part Number 1=160-2162-1-ND, Voltage - Forward (Vf) (Typ)="2.1V Red, 3.35V Green, 3.35V Blue", Category=Optoelectronics, ComponentLink1Description=http://optoelectronics.liteon.com/upload/download/DS22-2008-0044/S_110_LTST-C19HE1WT.pdf, ComponentLink1URL=http://optoelectronics.liteon.com/upload/download/DS22-2008-0044/S_110_LTST-C19HE1WT.pdf, Features=-, Height (Max)=0.35mm, Lens Style/Size="Rectangle with Flat Top, 1.15mm x 1.60mm", Lens Transparency=Diffused, Manufacturer Part Number=LTST-C19HE1WT, Mounting Type="Surface Mount", Packaging="Cut Tape (CT)", Part Status=Active, Pricing 1="1=0.45, 10=0.32, 25=0.2616, 100=0.2093, 250=0.17664, 500=0.15048, 1000=0.11776 (GBP)", RoHS="RoHS Compliant", Size / Dimension="1.60mm L x 1.60mm W", Stock 1=464778, Supplier 1=Digi-Key, Viewing Angle=130°, Wavelength - Dominant="624nm Red, 525nm Green, 470nm Blue", Wavelength - Peak="632nm Red, 520nm Green, 468nm Blue"
D3: "1.6 x 0.8 x 0.55mm (0603) LED 620nm Red", Colour=Red, Current - Test=20mA, Luminous Flux @ Current - Test=-, Manufacturer="Rohm Semiconductor", Manufacturer Part Number=SML-D12U8WT86, Millicandela Rating=63mcd, Package / Case="0603 (1608 Metric)", Supplier Part Number 1=511-1580-1-ND, Voltage - Forward (Vf) (Typ)=2.2V, Category=Optoelectronics, ComponentLink1Description=http://rohmfs.rohm.com/en/products/databook/datasheet/opto/led/chip_mono/sml-d1.pdf, ComponentLink1URL=http://rohmfs.rohm.com/en/products/databook/datasheet/opto/led/chip_mono/sml-d1.pdf, Height=0.55mm, Lens Style/Size="Rectangle with Flat Top, 1.2mm x 0.8mm", Lens Type="Diffused, White", Mounting Type="Surface Mount", Packaging="Cut Tape (CT)", Pricing 1="1=0.38, 10=0.279, 25=0.2232, 100=0.1478, 250=0.1046, 500=0.08926, 1000=0.06974 (GBP)", RoHS="RoHS Compliant", Size / Dimension="1.60mm L x 0.80mm W", Stock 1=5722, Supplier 1=Digi-Key, Supplier 2=Farnell, Supplier Part Number 2=1685094, Viewing Angle=-, Wavelength - Dominant=620nm, Wavelength - Peak=-
FB1: "MURATA - BLM18AG601SN1D - Feritový Korálek, 0603 / 1608, 600 ohm, 500 mA, Série BLM18A, 0.38 ohm, ± 25%", Case Code (Imperial)=0603, Case Code (Metric)=1608, Current Rating=500mA, DC Resistance (DCR)=380mR, Frequency=100MHz, Manufacturer=Murata, Max Operating Temperature=125°C, Min Operating Temperature=-55°C, Package Quantity=1, Supplier Part Number 1=490-1014-1-ND, Tolerance=25%, Case/Package=0603, Category=Inductors, ComponentLink1Description=https://datasheet.ciiva.com/19460/1844766-19460213.pdf?src-supplier=Jameco, ComponentLink1URL=https://datasheet.ciiva.com/19460/1844766-19460213.pdf?src-supplier=Jameco, ComponentLink2Description=https://datasheet.ciiva.com/29347/442309-da-01-en-chip-drossel-0603-600r-500ma-1-6x0-8mm-29347900.pdf?src-supplier=Conrad, ComponentLink2URL=https://datasheet.ciiva.com/29347/442309-da-01-en-chip-drossel-0603-600r-500ma-1-6x0-8mm-29347900.pdf?src-supplier=Conrad, ComponentLink3Description=https://datasheet.ciiva.com/41449/001172228-da-01-en-drossel-0603-600r-1-6x0-8mm-4000st-41449517.pdf?src-supplier=Conrad, ComponentLink3URL=https://datasheet.ciiva.com/41449/001172228-da-01-en-drossel-0603-600r-1-6x0-8mm-4000st-41449517.pdf?src-supplier=Conrad, ComponentLink4Description=https://datasheet.ciiva.com/1012/l0110s0100blm18a-1012017.pdf?src-supplier=Digi-Key, ComponentLink4URL=https://datasheet.ciiva.com/1012/l0110s0100blm18a-1012017.pdf?src-supplier=Digi-Key, ComponentLink5Description=https://datasheet.ciiva.com/1012/l0110s0100blm18a-1012018.pdf?src-supplier=Digi-Key, ComponentLink5URL=https://datasheet.ciiva.com/1012/l0110s0100blm18a-1012018.pdf?src-supplier=Digi-Key, ComponentLink6Description=https://datasheet.ciiva.com/1012/l0110s0100blm18a-1012019.pdf?src-supplier=Digi-Key, ComponentLink6URL=https://datasheet.ciiva.com/1012/l0110s0100blm18a-1012019.pdf?src-supplier=Digi-Key, ComponentLink7Description=https://datasheet.ciiva.com/1466/1756147-1466933.pdf?src-supplier=Element14, ComponentLink7URL=https://datasheet.ciiva.com/1466/1756147-1466933.pdf?src-supplier=Element14, ComponentLink8Description=https://datasheet.ciiva.com/1466/1756147-1466934.pdf?src-supplier=Element14, ComponentLink8URL=https://datasheet.ciiva.com/1466/1756147-1466934.pdf?src-supplier=Element14, ComponentLink9Description=https://datasheet.ciiva.com/16210/l0110s0100blm18a-16210006.pdf?src-supplier=Future+Electronics, ComponentLink9URL=https://datasheet.ciiva.com/16210/l0110s0100blm18a-16210006.pdf?src-supplier=Future+Electronics, ComponentLink10Description=https://datasheet.ciiva.com/3081/l0110s0100blm18a-3081613.pdf?src-supplier=Avnet, ComponentLink10URL=https://datasheet.ciiva.com/3081/l0110s0100blm18a-3081613.pdf?src-supplier=Avnet, Core Material=Ferrite, DC Current=500mA, Depth=0.8mm, Height=0.8mm, Impedance=600R, Lead Free="Lead Free", Length=1.6mm, Manufacturer Part Number=BLM18AG601SN1D, Material=Steel,Ferrite, Max Current Rating=500mA, Max DC Current=500mA, Military Standard=Not, Number of Circuits=1, Number of Lines=1, Number of Pins=2, Packaging="Tape and Reel", Pricing 1="1=0.10000, 10=0.07900, 25=0.07200, 50=0.06480, 100=0.04760, 250=0.03460, 500=0.03170, 1000=0.02738 (USD)", Radiation Hardening=No, REACH SVHC="No SVHC", RoHS=Yes, Shielding=Unshielded, Stock 1=351346, Supplier 1=Digi-Key, Termination=SMD/SMT, Test Frequency=100MHz, Weight=7.1E-05oz, Width=0.8mm
IO1 IO2: "Test Point"
J1: "Conn Shrouded Header HDR 2 POS 1mm Solder RA SMD T/R", Color=Natural, Contact Resistance=40mR, Current Rating=700mA, Flammability Rating="UL94 V-0", Housing Color=Beige, Insulation Resistance=100MR, Manufacturer=JST, Max Current Rating=1A, Max Operating Temperature=85°C, Max Voltage Rating (AC)=50V, Min Operating Temperature=-25°C, Supplier Part Number 1=1679117, ComponentLink1Description=https://datasheet.ciiva.com/26924/getdatasheetpartid-640850-26924055.pdf?src-supplier=Verical, ComponentLink1URL=https://datasheet.ciiva.com/26924/getdatasheetpartid-640850-26924055.pdf?src-supplier=Verical, ComponentLink2Description=https://datasheet.ciiva.com/712/esr-712467.pdf?src-supplier=Digi-Key, ComponentLink2URL=https://datasheet.ciiva.com/712/esr-712467.pdf?src-supplier=Digi-Key, ComponentLink3Description=https://datasheet.ciiva.com/712/esr-712468.pdf?src-supplier=Digi-Key, ComponentLink3URL=https://datasheet.ciiva.com/712/esr-712468.pdf?src-supplier=Digi-Key, ComponentLink4Description=https://datasheet.ciiva.com/730/esr-730600.pdf?src-supplier=Digi-Key, ComponentLink4URL=https://datasheet.ciiva.com/730/esr-730600.pdf?src-supplier=Digi-Key, ComponentLink5Description=https://datasheet.ciiva.com/8052/91630-8052284.pdf?src-supplier=Element14, ComponentLink5URL=https://datasheet.ciiva.com/8052/91630-8052284.pdf?src-supplier=Element14, ComponentLink6Description=https://datasheet.ciiva.com/16391/sm02b-srss-tblfsn-16391308.pdf?src-supplier=Future+Electronics, ComponentLink6URL=https://datasheet.ciiva.com/16391/sm02b-srss-tblfsn-16391308.pdf?src-supplier=Future+Electronics, Connector Type="Header,Male Pin", Contact Material="Copper Alloy,Copper", Contact Plating=Tin,Copper,Lead, Contact Shape=Square, Depth=4.95mm, Fastening Type=Push,Pull, Housing Material=Polyamide, Insulation Color=Natural, Insulation Material=Nylon, Lead Free="Lead Free", Lead Pitch=1mm, Length=4mm, Manufacturer Part Number=SM02B-SRSS-TB(LF)(SN), Material=Polyamide, Mount="Surface Mount", Number of Contacts=2, Number of Positions=2, Number of Rows=1, Orientation="Right Angle", Packaging="Tape and Reel", Pitch=1mm, Pricing 1="100=0.24600, 500=0.21400, 1000=0.17700, 2500=0.15600, 5000=0.13600, 10000=0.13000 (GBP)", REACH SVHC="No SVHC", RoHS=Yes, Stock 1=47603, Supplier 1=Farnell, Termination=Solder, Voltage Rating=50V, Voltage Rating (AC)=50V
J2: "CONN USB MICRO B RECPT SMT R/A", Color=Black, Current Rating="1.8A per Contact", Flammability Rating="UL94 V-0", Insulation Resistance=1GR, Manufacturer="Amphenol FCI", Manufacturer Part Number=10118194-0001LF, Max Operating Temperature=85°C, Max Voltage Rating (AC)=100V, Min Operating Temperature=-55°C, Operating Temperature="-30°C ~ 80°C", Package Quantity=9600, Supplier Part Number 1=649-10118194-0001LF, Voltage - Rated=100VAC, Category="Connectors, Interconnects", ComponentLink1Description="FCI drawing", ComponentLink1URL=http://portal.fciconnect.com/Comergent//fci/drawing/10118194.pdf, ComponentLink2Description="FCI datasheet", ComponentLink2URL=https://cdn.amphenol-icc.com/media/wysiwyg/files/documentation/datasheet/inputoutput/io_usb_micro.pdf, Connector Type="USB - micro B", Contact Finish=Gold, Contact Material="Copper Alloy", Contact Plating=Gold, Created By=HUGHWI, Depth=5mm, Features="Solder Retention", Gender=Receptacle, Housing Material=Polymer, Ingress Protection=-, Insulation Color=Black, Lead Free="Lead Free", Length=8.05mm, Material Flammability Rating="UL94 V-0", Mating Cycles=10000, Mount="Surface Mount,Horizontal", Mounting Feature=Horizontal, Mounting Type="Surface Mount, Right Angle; Through Hole", Number of Contacts=5, Number of Ports=1, Number of Terminals/Pins=5, Orientation="Right Angle", Packaging="Cut Tape (CT)", Part Status=Active, Pitch=0.65mm, Pricing 1="1=0.43000, 10=0.32000, 100=0.26800, 1200=0.21400, 2400=0.17500, 9600=0.17500 (USD)", Pricing 2="1=0.44910, 10=0.42910, 25=0.36770, 50=0.31260, 100=0.30030, 250=0.26960, 500=0.25740, 9600=0.19900, 96000=0.19390, 960000=0.16330, 4800000=0.14520, 9600000=0.14500 (USD)", Pricing 3="1=0.42000, 50=0.31500, 100=0.30000, 250=0.28000, 500=0.26500 (USD)", Radiation Hardening=No, RoHS="RoHS Compliant", Shell/Shielding Material="Steel, Stainless", Shielding=Shielded, Specifications="USB 2.0", Stock 1=7344, Stock 2=5099, Stock 3=725, Supplier 1=Mouser, Supplier 2="Arrow Electronics", Supplier 3="Future Electronics", Supplier Part Number 2=10118194-0001LF, Supplier Part Number 3=9100242, Termination=Solder
J3 J8: "CONN HEADER 2POS .100 VERT TIN", Color=Black, Manufacturer="Molex, LLC", Manufacturer Part Number=0022284020, Supplier Part Number 1=WM50014-02-ND, Category="Connectors, Interconnects", ComponentLink1Description=http://www.molex.com/pdm_docs/sd/022284020_sd.pdf, ComponentLink1URL=http://www.molex.com/pdm_docs/sd/022284020_sd.pdf, Connector Type="Header, Unshrouded, Breakaway", Contact Finish=Tin, Contact Finish Thickness="100µin (2.54µm)", Contact Mating Length="0.240\" (6.10mm)", Contact Type="Male Pin", Fastening Type=-, Features=-, Mounting Type="Through Hole", Number of Positions=2, Number of Positions Loaded=All, Number of Rows=1, Packaging=Bulk, Pitch="0.100\" (2.54mm)", Pricing 1="1=0.12, 10=0.108, 25=0.0808, 50=0.0692, 100=0.0668, 250=0.0576, 500=0.0553 (GBP)", RoHS="RoHS Compliant", Row Spacing=-, Stock 1=10077, Supplier 1=Digi-Key, Termination=Solder
J4 J5 J6 J10: "CONN HEADER 10POS DUAL .05\" SMD", Color=Black, Manufacturer="Samtec Inc.", Supplier Part Number 1=SAM8796-ND, Category="Connectors, Interconnects", ComponentLink1Description=http://suddendocs.samtec.com/prints/ftsh-1xx-xx-xxx-dv-xxx-mkt.pdf, ComponentLink1URL=http://suddendocs.samtec.com/prints/ftsh-1xx-xx-xxx-dv-xxx-mkt.pdf, Connector Type="Header, Unshrouded", Contact Finish=Gold, Contact Finish Thickness="3µin (0.08µm)", Contact Mating Length="0.120\" (3.05mm)", Contact Type="Male Pin", Fastening Type=-, Features="Keying Shroud", Manufacturer Part Number=FTSH-105-01-F-DV-K, Mounting Type="Surface Mount", Number of Positions=10, Number of Positions Loaded=All, Number of Rows=2, Packaging=Tube, Pitch="0.050\" (1.27mm)", Pricing 1="1=2.26, 10=1.907, 50=1.647, 100=1.4737, 250=1.30032, 500=1.21362, 1000=1.12693, 2500=1.08358, 5000=1.06191 (GBP)", RoHS="RoHS Compliant", Row Spacing="0.050\" (1.27mm)", Stock 1=13304, Supplier 1=Digi-Key, Termination=Solder
J7 J9 J12 J13: "CONN HEADER 3POS .100 VERT TIN", Color=Black, Manufacturer="Molex, LLC", Manufacturer Part Number=0022284030, Supplier Part Number 1=WM50014-03-ND, Category="Connectors, Interconnects", ComponentLink1Description=http://www.molex.com/pdm_docs/sd/022284030_sd.pdf, ComponentLink1URL=http://www.molex.com/pdm_docs/sd/022284030_sd.pdf, Connector Type="Header, Unshrouded, Breakaway", Contact Finish=Tin, Contact Finish Thickness="100µin (2.54µm)", Contact Mating Length="0.240\" (6.10mm)", Contact Type="Male Pin", Fastening Type=-, Features=-, Mounting Type="Through Hole", Number of Positions=3, Number of Positions Loaded=All, Number of Rows=1, Packaging=Bulk, Pitch="0.100\" (2.54mm)", Pricing 1="1=0.12, 10=0.115, 25=0.0984, 50=0.086, 100=0.0799, 250=0.07068, 500=0.0676 (GBP)", RoHS="RoHS Compliant", Row Spacing=-, Stock 1=4665, Supplier 1=Digi-Key, Termination=Solder
J11: "CONN HEADER 4POS .100 VERT TIN", Color=Black, Manufacturer="Molex, LLC", Manufacturer Part Number=0022284040, Supplier Part Number 1=WM50014-04-ND, Category="Connectors, Interconnects", ComponentLink1Description=http://www.molex.com/pdm_docs/sd/022284040_sd.pdf, ComponentLink1URL=http://www.molex.com/pdm_docs/sd/022284040_sd.pdf, Connector Type="Header, Unshrouded, Breakaway", Contact Finish=Tin, Contact Finish Thickness="100µin (2.54µm)", Contact Mating Length="0.240\" (6.10mm)", Contact Type="Male Pin", Fastening Type=-, Features=-, Mounting Type="Through Hole", Number of Positions=4, Number of Positions Loaded=All, Number of Rows=1, Packaging=Bulk, Pitch="0.100\" (2.54mm)", Pricing 1="1=0.15, 10=0.144, 25=0.1228, 50=0.1074, 100=0.0999, 250=0.08836, 500=0.0845 (GBP)", RoHS="RoHS Compliant", Row Spacing=-, Stock 1=1330, Supplier 1=Digi-Key, Termination=Solder
L1 L2: library part NR3015T2R2M, "FIXED IND 2.2UH 1.5A 72 MOHM SMD", Current - Saturation=1.48A, Current Rating=1.5A, DC Resistance (DCR)="72 mOhm Max", Frequency - Self Resonant=64MHz, Frequency - Test=100kHz, Manufacturer="Taiyo Yuden", Operating Temperature="-25°C ~ 120°C", Package / Case=Nonstandard, Q @ Freq=-, Supplier Part Number 1=587-1648-1-ND, Tolerance=±20%, Category="Inductors, Coils, Chokes", ComponentLink1Description=http://ds.yuden.co.jp/TYCOMPAS/ut/detail.do?productNo=NR3015T2R2M&fileName=NR3015T2R2M_SS&mode=specSheetDownload, ComponentLink1URL=http://ds.yuden.co.jp/TYCOMPAS/ut/detail.do?productNo=NR3015T2R2M&fileName=NR3015T2R2M_SS&mode=specSheetDownload, Height - Seated (Max)="0.059\" (1.50mm)", Inductance=2.2µH, Manufacturer Part Number=NR3015T2R2M, Material - Core=Ferrite, Mounting Type="Surface Mount", Packaging="Cut Tape (CT)", Pricing 1="1=0.23, 10=0.209, 25=0.1864, 50=0.163, 100=0.1513, 250=0.13964, 500=0.13268, 1000=0.10707 (GBP)", Ratings=-, RoHS="RoHS Compliant", Shielding=Shielded, Size / Dimension="0.118\" L x 0.118\" W (3.00mm x 3.00mm)", Stock 1=150589, Supplier 1=Digi-Key, Type=Wirewound
M1: library part "AES-MS-MT3620-M-G (SAT)"
Q1: "N-CH 60V 0.26A 3-Pin SOT-23 T/R", Case/Package=SOT-23-3, Continuous Drain Current (ID)=260mA, Drain to Source Breakdown Voltage=60V, Drain to Source Resistance=2.5R, Gate to Source Voltage (Vgs)=20V, Input Capacitance=26.7pF, Manufacturer="ON Semiconductor", Max Operating Temperature=150°C, Max Power Dissipation=300mW, Min Operating Temperature=-55°C, Package Quantity=3000, Supplier Part Number 1=2N7002ET1GOSCT-ND, Threshold Voltage=1V, Category=MOSFETs, ComponentLink1Description=https://datasheet.ciiva.com/936/2n7002e-d-936787.pdf?src-supplier=Digi-Key, ComponentLink1URL=https://datasheet.ciiva.com/936/2n7002e-d-936787.pdf?src-supplier=Digi-Key, ComponentLink2Description=https://datasheet.ciiva.com/8059/2n7002e-d-8059427.pdf?src-supplier=Element14, ComponentLink2URL=https://datasheet.ciiva.com/8059/2n7002e-d-8059427.pdf?src-supplier=Element14, ComponentLink3Description=https://datasheet.ciiva.com/13060/2n7002e-d-105476-13060091.pdf?src-supplier=Mouser, ComponentLink3URL=https://datasheet.ciiva.com/13060/2n7002e-d-105476-13060091.pdf?src-supplier=Mouser, ComponentLink4Description=https://datasheet.ciiva.com/936/2n7002e-d-936788.pdf?src-supplier=Digi-Key, ComponentLink4URL=https://datasheet.ciiva.com/936/2n7002e-d-936788.pdf?src-supplier=Digi-Key, ComponentLink5Description=https://datasheet.ciiva.com/936/2n7002e-d-936789.pdf?src-supplier=Digi-Key, ComponentLink5URL=https://datasheet.ciiva.com/936/2n7002e-d-936789.pdf?src-supplier=Digi-Key, ComponentLink6Description=https://datasheet.ciiva.com/3304/2n7002e-d-3304389.pdf?src-supplier=Avnet, ComponentLink6URL=https://datasheet.ciiva.com/3304/2n7002e-d-3304389.pdf?src-supplier=Avnet, ComponentLink7Description=https://datasheet.ciiva.com/3304/2n7002e-d-3304390.pdf?src-supplier=Avnet, ComponentLink7URL=https://datasheet.ciiva.com/3304/2n7002e-d-3304390.pdf?src-supplier=Avnet, ComponentLink8Description=https://datasheet.ciiva.com/15198/getdatasheetpartid-53846-15198758.pdf?src-supplier=Verical, ComponentLink8URL=https://datasheet.ciiva.com/15198/getdatasheetpartid-53846-15198758.pdf?src-supplier=Verical, ComponentLink9Description=https://datasheet.ciiva.com/26146/2n7002e-d-26146200.pdf?src-supplier=Avnet+Europe, ComponentLink9URL=https://datasheet.ciiva.com/26146/2n7002e-d-26146200.pdf?src-supplier=Avnet+Europe, ComponentLink10Description=https://datasheet.ciiva.com/49018/70339334-49018202.pdf?src-supplier=Allied+Electronics, ComponentLink10URL=https://datasheet.ciiva.com/49018/70339334-49018202.pdf?src-supplier=Allied+Electronics, ComponentLink11Description=https://datasheet.ciiva.com/22641/1708226-22641627.pdf?src-supplier=Element14, ComponentLink11URL=https://datasheet.ciiva.com/22641/1708226-22641627.pdf?src-supplier=Element14, ComponentLink12Description=https://datasheet.ciiva.com/16305/2n7002e-d-16305452.pdf?src-supplier=Future+Electronics, ComponentLink12URL=https://datasheet.ciiva.com/16305/2n7002e-d-16305452.pdf?src-supplier=Future+Electronics, ComponentLink13Description=https://datasheet.ciiva.com/22641/1708226-22641628.pdf?src-supplier=Element14, ComponentLink13URL=https://datasheet.ciiva.com/22641/1708226-22641628.pdf?src-supplier=Element14, Element Configuration=Single, Fall Time=1.2ns, Halogen Free="Halogen Free", Height=0.94mm, Lead Free="Lead Free", Length=2.9mm, Manufacturer Part Number=2N7002ET1G, Nominal Vgs=1V, Number of elements=1, Number of Pins=3, On-State Resistance=2.5R, Packaging="Tape and Reel", Power Dissipation=300mW, Pricing 1="1=0.18000, 10=0.16300, 25=0.15520, 100=0.06820, 250=0.06548, 500=0.05356, 1000=0.03720 (USD)", Radiation Hardening=No, Rds On Max=2.5R, REACH SVHC="No SVHC", Rise Time=1.2ns, RoHS=Yes, Stock 1=23546, Supplier 1=Digi-Key, Turn-Off Delay Time=4.8ns, Turn-On Delay Time=1.7ns, Width=1.3mm
Q2 Q3: "MOSFET N&P-CH 30V (D-S)", Case/Package=TSOP, Continuous Drain Current (ID)=2.5A, Drain to Source Breakdown Voltage=30V, Drain to Source Resistance=170mR, Gate to Source Voltage (Vgs)=12V, Manufacturer="Vishay Siliconix", Max Operating Temperature=150°C, Max Power Dissipation=830mW, Min Operating Temperature=-55°C, Package Quantity=3000, Supplier Part Number 1=SI3590DV-T1-E3DKR-ND, ComponentLink1Description=https://datasheet.ciiva.com/4441/72032-244663-4441688.pdf, ComponentLink1URL=https://datasheet.ciiva.com/4441/72032-244663-4441688.pdf, ComponentLink2Description=https://datasheet.ciiva.com/11158/72032-11158835.pdf, ComponentLink2URL=https://datasheet.ciiva.com/11158/72032-11158835.pdf, ComponentLink3Description=https://datasheet.ciiva.com/6388/72032-6388120.pdf, ComponentLink3URL=https://datasheet.ciiva.com/6388/72032-6388120.pdf, ComponentLink4Description=https://datasheet.ciiva.com/6388/72032-6388117.pdf, ComponentLink4URL=https://datasheet.ciiva.com/6388/72032-6388117.pdf, ComponentLink5Description=https://datasheet.ciiva.com/26145/72032-26145319.pdf, ComponentLink5URL=https://datasheet.ciiva.com/26145/72032-26145319.pdf, Drain to Source Voltage (Vdss)=30V, Fall Time=15ns, Height=1mm, Lead Free="Lead Free", Length=3.05mm, Manufacturer Part Number=SI3590DV-T1-E3, Mount="Surface Mount", Nominal Vgs=600mV, Number of Channels=2, Number of elements=2, Number of Pins=6, Packaging="Tape and Reel", Power Dissipation=830mW, Pricing 1="1=0.71, 10=0.612, 25=0.5712, 100=0.4568, 250=0.4242, 500=0.3589, 1000=0.2774 (USD)", Radiation Hardening=No, Rds On Max=77mR, REACH SVHC=Unknown, Rise Time=15ns, Stock 1=43293, Supplier 1=Digi-Key, Turn-Off Delay Time=20ns, Turn-On Delay Time=5ns, Weight=0.000705oz, Width=1.65mm